# Altium PCB DUT_ATMEGA328P-AU.PcbDoc
Units mm, origin at the board's own origin, x right, y up, seen from the top; angles counter-clockwise.
Board outline 33 x 90 mm, 2 copper layers (Top Layer, Bottom Layer); 13 components, 33 nets, 208 pads, 2 vias.
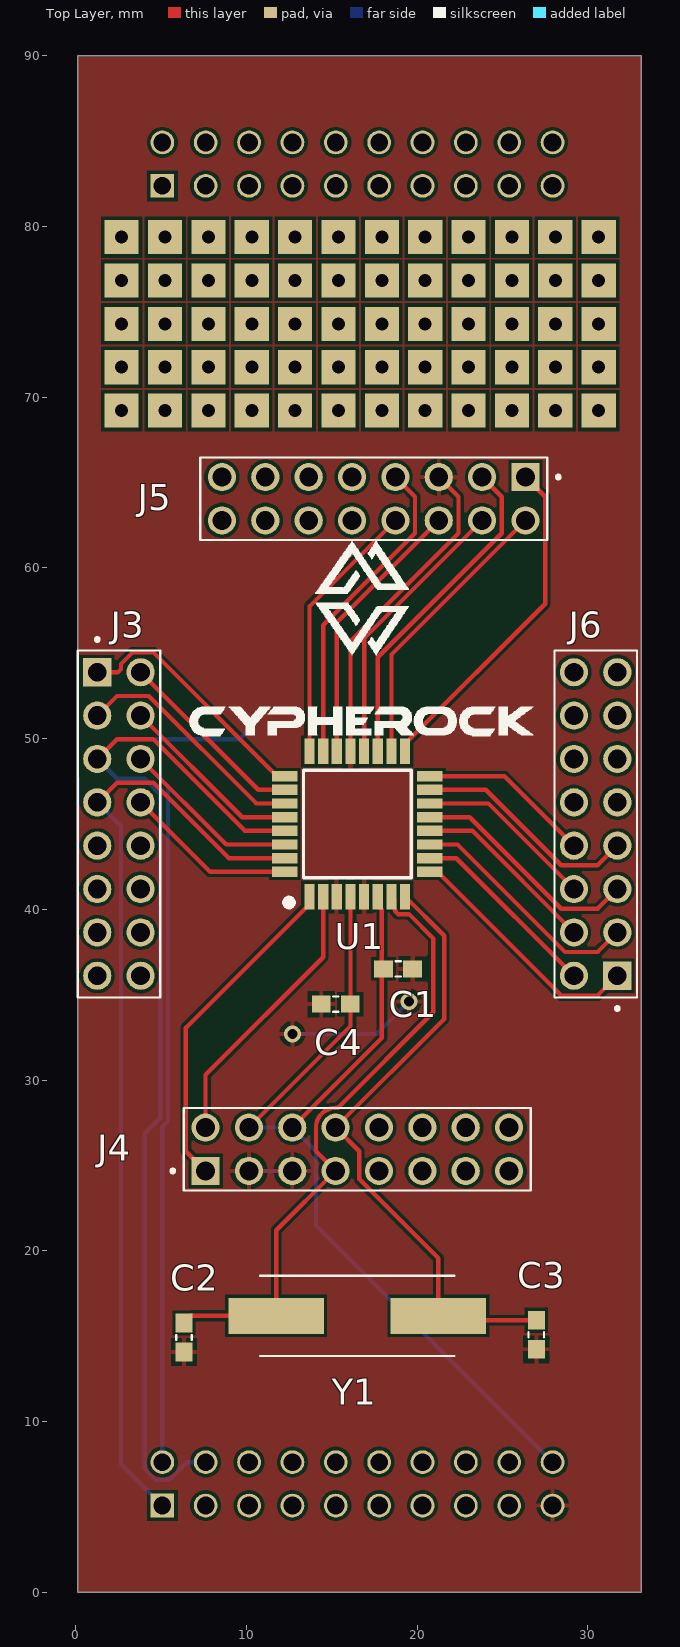
[diagram p0: Top Layer view]
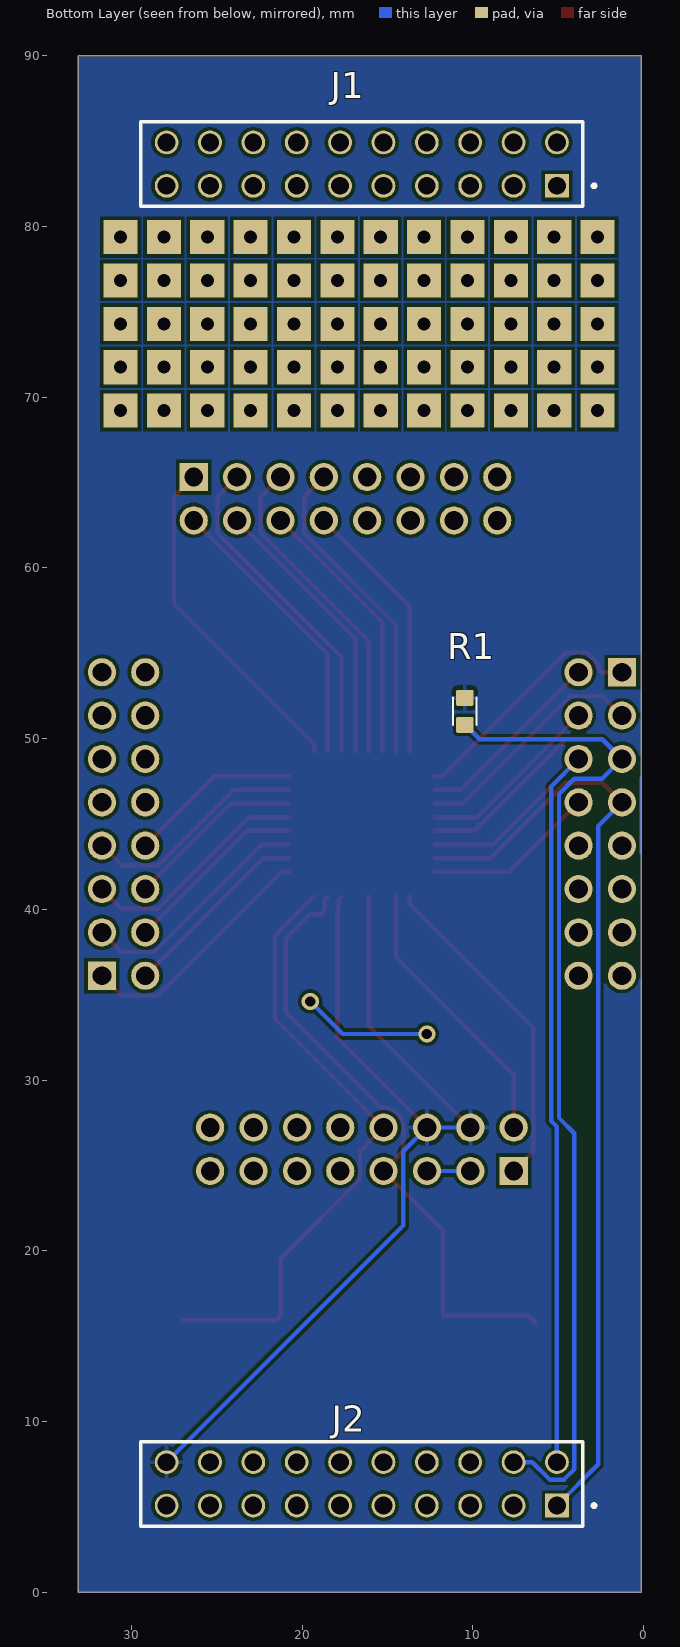
[diagram p1: Bottom Layer view, seen from below]
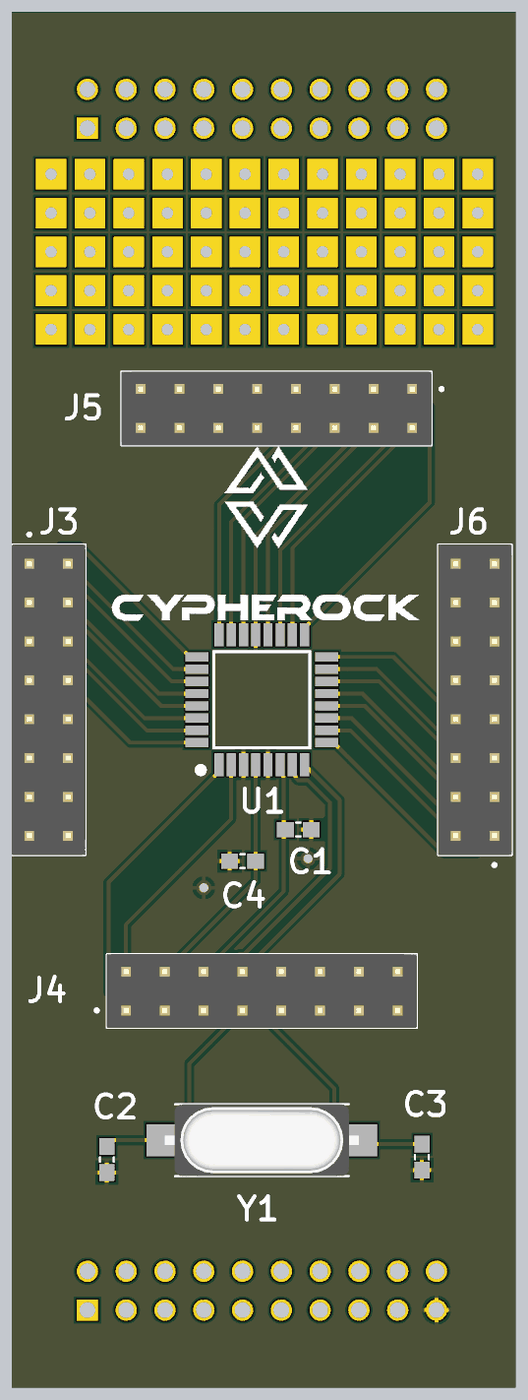
[diagram p2: 3D render of the assembled board from above, using the file's embedded part models]

## Layer stack, top to bottom
Top Solder: solder mask 0.0102, Solder Resist, Dk 3.5
Top Layer: signal copper 0.0356
Dielectric 1: dielectric 0.32, FR-4, Dk 4.8
Bottom Layer: signal copper 0.0356
Bottom Solder: solder mask 0.0102, Solder Resist, Dk 3.5

## Board outline
0.127,0 0.127,90 33.127,90 33.127,0

## Design rules (kind name [scope] priority, off if disabled: settings)
Clearance [All] p1: gap=0.2 ignorepadtopadclearanceinfootprint=FALSE except(0.15: Arc-SMDPad Track-SMDPad)
PolygonConnect [All] p1: connectstyle=Relief reliefconductorwidth=0.254 reliefentries=4 polygonreliefangle="90 Angle" airgapwidth=0.254
RoutingVias [All] p1: holewidth=0.711 width=1.27 viastyle="Through Hole" minholewidth=0.711 minwidth=1.27 maxholewidth=0.711 maxwidth=1.27
SolderMaskExpansion [All] p1: expansion=0.102 istentingtop=FALSE
Width [All] p1: maxlimit=0.254 minlimit=0.15 preferedwidth=0.254 minimp=50.000000 maximp=50.000000 favimp=50.000000
30 further rules are at their usual default settings.

## Components (designator, comment, footprint, x,y, rotation, side; value= is the part's Value field where it differs from the comment)
C1 "0.1uF" CAPC1608X90 18.891,36.512 r180 top
C2 "27pF" CAPC1608X90 6.35,14.922 r90 top
C3 "27pF" CAPC1608X90 26.987,15.081 r90 top
C4 "0.1uF" CAPC1608X90 15.24,34.449 r0 top
J1 "SSW-110-01-G-D-LL" SAMTEC_SSW-110-01-G-D-LL 5.08,82.38 r180 bottom
J2 "SSW-110-01-G-D-LL" SAMTEC_SSW-110-01-G-D-LL 5.08,5.08 r180 bottom locked
J3 "77313-124-16LF" AMPHENOL_77313-124-16LF 2.54,45 r270 top
J4 "77313-124-16LF" AMPHENOL_77313-124-16LF 16.5,25.95 r0 top
J5 "77313-124-16LF" AMPHENOL_77313-124-16LF 17.462,64.05 r180 top
J6 "77313-124-16LF" AMPHENOL_77313-124-16LF 30.46,45 r90 top locked
R1 "100k/0.1W" RESC1608X50N 10.477,51.594 r90 bottom
U1 "ATMEGA328P-AU" QFP80P900X900X120-32N 16.5,45 r90 top locked
Y1 "ABLS-8.000MHZ-B2-T" XTAL_ABLS-8.000MHZ-B2-T 16.5,16.192 r0 top locked

## Footprints (in the part's own frame and the unit in brackets; to place one, negate y for a bottom-side part, rotate by r counter-clockwise, add the part's x,y. Pads: shape width x height; smd on the part's side, far side on the other; paste and mask are expansions set on the pad)
AMPHENOL_77313-124-16LF [mm]
  rect 1.65x1.65 / inner round 1.65 / far side rect 1.65x1.65 hole 1.1: 01(-8.89,-1.27)
  round 1.65 hole 1.1: 02(-8.89,1.27) 03(-6.35,-1.27) 04(-6.35,1.27) 05(-3.81,-1.27) 06(-3.81,1.27) 07(-1.27,-1.27) 08(-1.27,1.27) 09(1.27,-1.27) 10(1.27,1.27) 11(3.81,-1.27) 12(3.81,1.27) 13(6.35,-1.27) 14(6.35,1.27) 15(8.89,-1.27) 16(8.89,1.27)
  silkscreen extent -10.91,-2.41 10.16,2.41, body extent -10.16,-2.41 10.16,2.41, height 9.3
CAPC1608X90 [mm]
  rect 1.1x1 smd: 1(-0.85,0) 2(0.85,0)
  silkscreen extent -0.15,-0.45 0.15,0.45
QFP80P900X900X120-32N [mm]
  rect 1.5x0.6 smd: 1(-4.25,2.8) 2(-4.25,2) 3(-4.25,1.2) 4(-4.25,0.4) 5(-4.25,-0.4) 6(-4.25,-1.2) 7(-4.25,-2) 8(-4.25,-2.8) 17(4.25,-2.8) 18(4.25,-2) 19(4.25,-1.2) 20(4.25,-0.4) 21(4.25,0.4) 22(4.25,1.2) 23(4.25,2) 24(4.25,2.8)
  rect 0.6x1.5 smd: 9(-2.8,-4.25) 10(-2,-4.25) 11(-1.2,-4.25) 12(-0.4,-4.25) 13(0.4,-4.25) 14(1.2,-4.25) 15(2,-4.25) 16(2.8,-4.25) 25(2.8,4.25) 26(2,4.25) 27(1.2,4.25) 28(0.4,4.25) 29(-0.4,4.25) 30(-1.2,4.25) 31(-2,4.25) 32(-2.8,4.25)
  silkscreen extent -4.8,-3.15 3.15,4.2
RESC1608X50N [mm]
  rrect20% 0.94x1.02 smd: 1(-0.79,0) 2(0.79,0)
  silkscreen extent -0.8,-0.69 0.8,0.69, body extent -0.8,-0.4 0.8,0.4, height 0.23
SAMTEC_SSW-110-01-G-D-LL [mm]
  rect 1.39x1.39 hole 1.04: 01(0,0)
  round 1.39 hole 1.04: 02(0,2.54) 03(-2.54,0) 04(-2.54,2.54) 05(-5.08,0) 06(-5.08,2.54) 07(-7.62,0) 08(-7.62,2.54) 09(-10.16,0) 10(-10.16,2.54) 11(-12.7,0) 12(-12.7,2.54) 13(-15.24,0) 14(-15.24,2.54) 15(-17.78,0) 16(-17.78,2.54) 17(-20.32,0) 18(-20.32,2.54) 19(-22.86,0) 20(-22.86,2.54)
  silkscreen extent -24.39,-1.21 2.27,3.75
XTAL_ABLS-8.000MHZ-B2-T [mm]
  rect 5.6x2.1 smd: 1(-4.75,0) 2(4.75,0)
  silkscreen extent -5.7,-2.35 5.7,2.35, body extent -6.35,-2.35 6.35,2.35, height 4.06

## Part data
C1 C4: library part CC0603MRX5R7BB106, "CAP CER 10UF 16V X5R 0603", Package=None, Availability=Unavailable, MP=CC0603MRX5R7BB106, Price=None
C2 C3: library part CC0603MRX5R7BB106, "0603", Package=None, Availability=Unavailable, MP=CC0603MRX5R7BB106, Price=None
J1 J2: Package=None, Availability=Unavailable, MF="Samtec Inc.", MP=SSW-110-01-G-D-LL, Price=None
J3 J4 J5 J6: "BergStikÂ®, Board to Board connector, Unshrouded Header, 2.54 mm Pitch, Vertical, Double Row,Through Hole, 16 Positions", Package=None, Check_prices=https://www.snapeda.com/parts/77313-124-16LF/Amphenol+FCI/view-part/?ref=eda, MF="Amphenol ICC (FCI)", MP=77313-124-16LF, SnapEDA_Link=https://www.snapeda.com/parts/77313-124-16LF/Amphenol+FCI/view-part/?ref=snap
R1: library part 3-1879460-5, "RES 0.27 OHM 1% 1/10W 0603", Package=0603, Power_Rating=".1 W", Resistance=27, Tolerance=1%, Availability="In Stock", Check_prices=https://www.snapeda.com/parts/3-1879460-5/TE+Connectivity/view-part/?ref=eda, EU_RoHS_Compliance="Compliant with Exemptions", MF="TE Connectivity", MP=3-1879460-5, Price=None, SnapEDA_Link=https://www.snapeda.com/parts/3-1879460-5/TE+Connectivity/view-part/?ref=snap
U1: "MICROCHIP - ATMEGA328P-AU. - MICROCONTROLLER MCU, 8 BIT, ATMEGA, 20MHZ, TQFP-32", Manufacturer_Name=Microchip, Mouser Part Number=556-ATMEGA328P-AU, Datasheet Link=https://componentsearchengine.com/Datasheets/2/ATMEGA328P-AU.pdf, Geometry.Height=1.2mm, Manufacturer_Part_Number=ATMEGA328P-AU, Mouser Price/Stock=https://www.mouser.co.uk/ProductDetail/Microchip-Technology/ATMEGA328P-AU?qs=K8BHR703ZXiCmmgp6%2FGNmQ%3D%3D
Y1: "HC/49US (AT49) SMD LOW PROFILE CRYSTAL", Package="HC49/US Abracon", Availability="In Stock", Check_prices=https://www.snapeda.com/parts/ABLS-8.000MHZ-B2-T/Abracon+LLC/view-part/?ref=eda, MF="Abracon LLC", MP=ABLS-8.000MHZ-B2-T, Price=None, Purchase-URL=https://pricing.snapeda.com/search/part/ABLS-8.000MHZ-B2-T/?ref=eda, SnapEDA_Link=https://www.snapeda.com/parts/ABLS-8.000MHZ-B2-T/Abracon+LLC/view-part/?ref=snap

## Free pads (board coordinates)
  rect 2x2 hole 0.762: 17(2.699,69.215) 17(2.699,71.755) 17(2.699,74.295) 17(2.699,76.835) 17(2.699,79.375) 17(5.239,69.215) 17(5.239,71.755) 17(5.239,74.295) 17(5.239,76.835) 17(5.239,79.375) 17(7.779,69.215) 17(7.779,71.755) 17(7.779,74.295) 17(7.779,76.835) 17(7.779,79.375) 17(10.319,69.215) 17(10.319,71.755) 17(10.319,74.295) 17(10.319,76.835) 17(10.319,79.375) 17(12.859,69.215) 17(12.859,71.755) 17(12.859,74.295) 17(12.859,76.835) 17(12.859,79.375) 17(15.399,69.215) 17(15.399,71.755) 17(15.399,74.295) 17(15.399,76.835) 17(15.399,79.375) 17(17.939,69.215) 17(17.939,71.755) 17(17.939,74.295) 17(17.939,76.835) 17(17.939,79.375) 17(20.479,69.215) 17(20.479,71.755) 17(20.479,74.295) 17(20.479,76.835) 17(20.479,79.375) 17(23.019,69.215) 17(23.019,71.755) 17(23.019,74.295) 17(23.019,76.835) 17(23.019,79.375) 17(25.559,69.215) 17(25.559,71.755) 17(25.559,74.295) 17(25.559,76.835) 17(25.559,79.375) 17(28.099,69.215) 17(28.099,71.755) 17(28.099,74.295) 17(28.099,76.835) 17(28.099,79.375) 17(30.639,69.215) 17(30.639,71.755) 17(30.639,74.295) 17(30.639,76.835) 17(30.639,79.375)

## Via types
v1: diameter 1, hole 0.6, Top Layer to Bottom Layer, tented top, 2 vias

## Nets (pads, with @x,y where several pads share a name; then routed paths per layer and width w, separated by ;. In a path a pad name is that pad's centre, name@x,y a point inside that pad or via, vN(x,y) a via of type N, cw(c..) or ccw(c..) an arc to the next point about the centre after c; other vN are vias at no path point)
3V3: C1.2 C4.2 J2.20 J4.04 J4.06 R1.2 U1.4 U1.6 | length 60.3
  Top Layer w0.254: J4.04 16.1,33.17 U1.4 ; J4.06 17.939,32.469 17.939,39.87 17.923,39.885 17.923,39.978 17.873,40.028 17.873,40.577 U1.6
  Bottom Layer w0.254: J4.04 J4.06 14.078,25.832 14.078,21.482 J2.20
GND: J2.17
GNDA: C1.1 C2.1 C3.1 C4.1 J2.19 J4.03 J4.05 J5.05 U1.3 U1.5 U1.21 | length 29.3
  Top Layer w0.254: U1.21 16.1,55.71 22.424,62.034 22.424,64.168 J5.05
  Bottom Layer w0.254: J4.03 J4.05 ; v1(12.7,32.703) 17.621,32.703 v1(19.526,34.608)
NetC2_2: C2.2 J4.07 U1.7 Y1.1 | length 36.6
  Top Layer w0.254: C2.2 6.35,15.819 6.723,16.192 Y1.1 11.75,21.2 J4.07 14.078,25.832 14.078,27.047 cw(c14.332,27.046) 14.078,27.055 14.081,27.124 ccw(c13.827,27.133) 14.08,27.147 cw(c15.23,27.22) 15.247,28.372 15.249,28.372 15.354,28.372 20.955,33.972 20.955,38.295 19.527,39.723 18.885,39.723 18.723,39.885 18.723,39.978 18.673,40.028 18.673,40.577 U1.7
NetC3_2: C3.2 J4.08 U1.8 Y1.2 | length 36.5
  Top Layer w0.254: U1.8 21.59,38.46 21.59,33.58 J4.08 16.618,25.832 16.618,24.203 21.25,19.571 Y1.2 21.511,15.931 C3.2
NetJ2_01: J2.01 J3.07 U1.31 | length 56.1
  Top Layer w0.254: J3.07 2.422,47.422 4.556,47.422 8.978,43 U1.31
  Bottom Layer w0.254: J3.07 2.658,44.882 2.658,7.502 J2.01
NetJ2_02: J2.02 J3.06 U1.30 | length 52.5
  Top Layer w0.254: J3.06 8.82,43.8 U1.30
  Bottom Layer w0.254: J3.06 5.416,47.204 5.416,27.599 5.08,27.263 J2.02
NetJ2_03: J2.03
NetJ2_04: J2.04 J3.05 R1.1 U1.29 | length 72.4
  Top Layer w0.254: J3.05 2.422,49.962 4.556,49.962 9.918,44.6 U1.29
  Bottom Layer w0.254: J2.04 6.525,7.62 5.503,6.598 4.657,6.598 4.058,7.197 4.058,26.883 4.962,27.787 4.962,46.747 4.064,47.645 2.435,47.645 J3.05 2.422,49.962 9.596,49.962 10.438,50.804 R1.1
NetJ2_07: J2.07
NetJ2_08: J2.08
NetJ3_01: J3.01 U1.25 | length 14.6
  Top Layer w0.254: J3.01 2.476,53.89 2.658,54.072 2.658,54.367 3.333,55.042 4.558,55.042 11.8,47.8 U1.25
NetJ3_02: J3.02 U1.26 | length 11.3
  Top Layer w0.254: J3.02 10.7,47 U1.26
NetJ3_03: J3.03 U1.27 | length 14.1
  Top Layer w0.254: J3.03 2.422,52.502 4.287,52.502 10.589,46.2 U1.27
NetJ3_04: J3.04 U1.28 | length 10.9
  Top Layer w0.254: J3.04 9.76,45.4 U1.28
NetJ3_08: J3.08 U1.32 | length 10.1
  Top Layer w0.254: J3.08 7.88,42.2 U1.32
NetJ4_01: J4.01 U1.1 | length 19.5
  Top Layer w0.254: J4.01 6.458,25.832 6.458,33.058 13.7,40.3 U1.1
NetJ4_02: J4.02 U1.2 | length 16.4
  Top Layer w0.254: J4.02 7.61,30.311 14.5,37.201 U1.2
NetJ5_01: J5.01 U1.17 | length 19.9
  Top Layer w0.254: U1.17 19.3,49.7 27.504,57.904 27.504,64.168 J5.01
NetJ5_02: J5.02 U1.18 | length 16.8
  Top Layer w0.254: U1.18 18.5,54.927 J5.02
NetJ5_03: J5.03 U1.19 | length 19.6
  Top Layer w0.254: U1.19 17.7,54.77 24.964,62.034 24.964,64.168 J5.03
NetJ5_04: J5.04 U1.20 | length 16.4
  Top Layer w0.254: U1.20 16.9,55.867 J5.04
NetJ5_06: J5.06 U1.22 | length 16
  Top Layer w0.254: U1.22 15.3,56.807 J5.06
NetJ5_07: J5.07 U1.23 | length 18.8
  Top Layer w0.254: U1.23 14.5,56.65 19.884,62.034 19.884,64.168 J5.07
NetJ5_08: J5.08 U1.24 | length 15.6
  Top Layer w0.254: U1.24 13.7,57.747 J5.08
NetJ6_01: J6.01 U1.9 | length 14.5
  Top Layer w0.254: U1.9 21.2,42.2 28.442,34.958 30.578,34.958 J6.01
NetJ6_02: J6.02 U1.10 | length 11.3
  Top Layer w0.254: U1.10 22.3,43 J6.02
NetJ6_03: J6.03 U1.11 | length 14.1
  Top Layer w0.254: U1.11 22.369,43.8 28.671,37.498 30.578,37.498 J6.03
NetJ6_04: J6.04 U1.12 | length 10.9
  Top Layer w0.254: U1.12 23.24,44.6 J6.04
NetJ6_05: J6.05 U1.13 | length 13.7
  Top Layer w0.254: U1.13 23.082,45.4 28.444,40.038 30.578,40.038 J6.05
NetJ6_06: J6.06 U1.14 | length 10.5
  Top Layer w0.254: U1.14 24.18,46.2 J6.06
NetJ6_07: J6.07 U1.15 | length 13.3
  Top Layer w0.254: U1.15 24.022,47 28.444,42.578 30.578,42.578 J6.07
NetJ6_08: J6.08 U1.16 | length 10.1
  Top Layer w0.254: U1.16 25.12,47.8 J6.08
pads on no net: J1.01 J1.02 J1.03 J1.04 J1.05 J1.06 J1.07 J1.08 J1.09 J1.10 J1.11 J1.12 J1.13 J1.14 J1.15 J1.16 J1.17 J1.18 J1.19 J1.20 J2.05 J2.06 J2.09 J2.10 J2.11 J2.12 J2.13 J2.14 J2.15 J2.16 J2.18 J3.09 J3.10 J3.11 J3.12 J3.13 J3.14 J3.15 J3.16 J4.09 J4.10 J4.11 J4.12 J4.13 J4.14 J4.15 J4.16 J5.09 J5.10 J5.11 J5.12 J5.13 J5.14 J5.15 J5.16 J6.09 J6.10 J6.11 J6.12 J6.13 J6.14 J6.15 J6.16
copper on no net: | length 4.4
  Bottom Layer w0.15: 0.17,43.274 0.17,47.71

## Polygon pours and split planes (outlines as drawn)
3V3 on Bottom Layer "3V3_L02_P001" (solid, remove dead copper, pour order 1): 0.127,89.916 0.127,0 33.147,0 33.147,89.916
GNDA on Top Layer "GNDA_L01_P000" (solid, remove dead copper, pour order 0): 0.127,89.916 0.127,0 33.147,0 33.147,89.916

## Silkscreen, mask and mechanical layers (free items; w line width, h text height)
Top Overlay:
  drawing of 11 lines, arcs and shapes, not listed